# Altium PCB irsensorLED.PcbDoc
Units mil, origin at the board's own origin, x right, y up, seen from the top; angles counter-clockwise.
Board outline 6000 x 4000 mil, 2 copper layers (Top Layer, Bottom Layer); 12 components, 7 nets, 32 pads, 0 vias.
Unrouted connection lines stored in the file: 22.
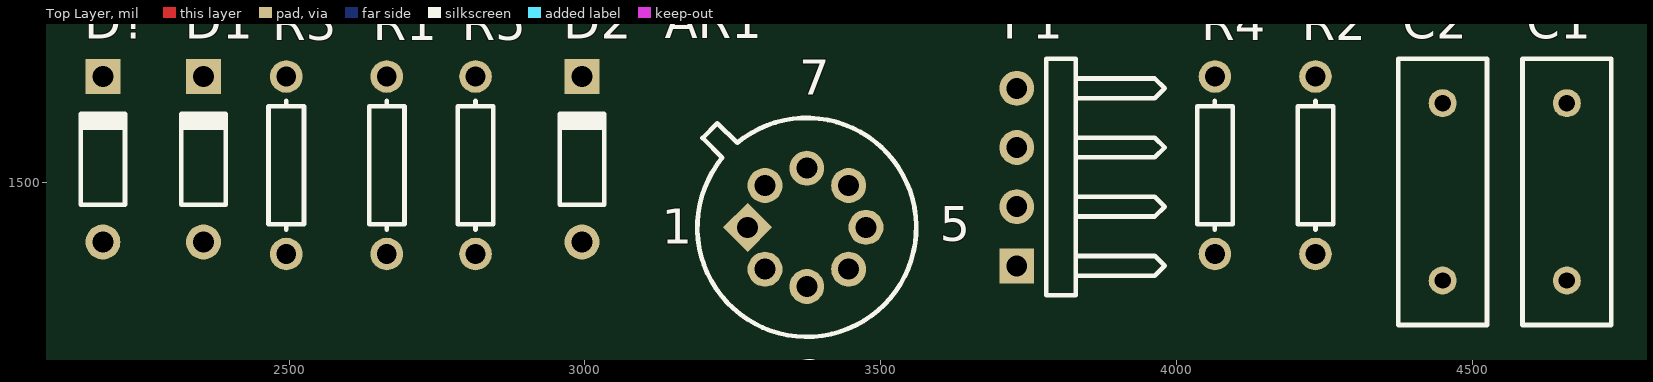
[diagram p0: Top Layer view]
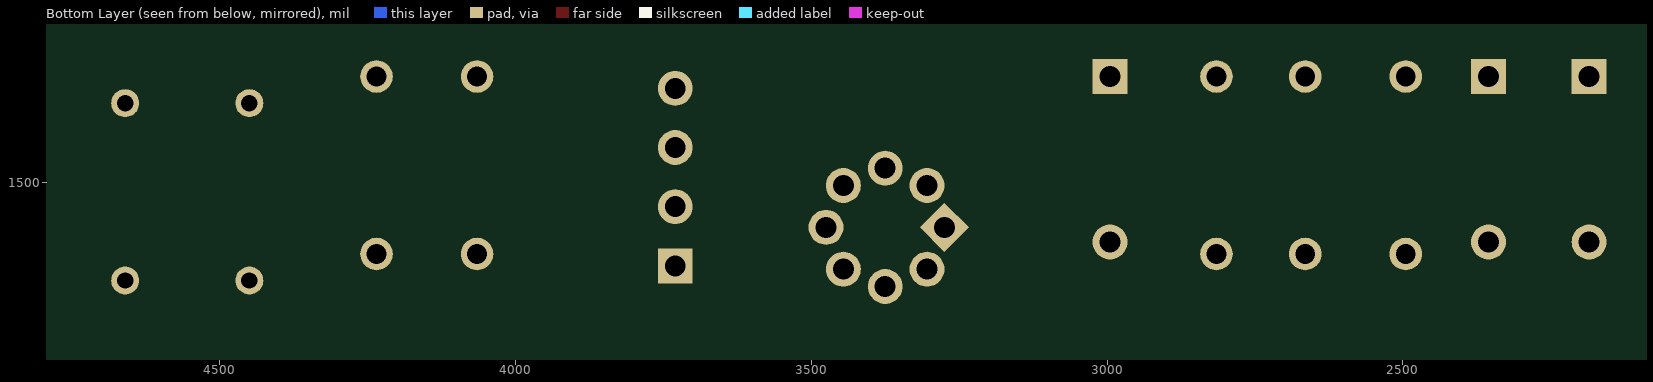
[diagram p1: Bottom Layer view, seen from below]

## Layer stack, top to bottom
Top Solder: solder mask 0.4, Solder Resist, Dk 3.5
Top Layer: signal copper 1.4
Dielectric 1: dielectric 12.6, FR-4, Dk 4.8
Bottom Layer: signal copper 1.4
Bottom Solder: solder mask 0.4, Solder Resist, Dk 3.5

## Board outline
1000,1000 7000,1000 7000,5000 1000,5000

## Design rules (kind name [scope] priority, off if disabled: settings)
Clearance [All] p1: gap=10 ignorepadtopadclearanceinfootprint=FALSE except(0: Arc-Hole Track-Hole SMDPad-Hole THPad-Hole Via-Hole Fill-Hole Poly-Hole Region-Hole Text-Hole)
PolygonConnect [All] p1: connectstyle=Relief reliefconductorwidth=10 reliefentries=4 polygonreliefangle="90 Angle" airgapwidth=10
RoomDefinition irsensorLED [InComponentClass('irsensorLED')] p1: confinementstyle=ConfineIn formatcopy=TRUE lockcomponents=FALSE outline 2135,1125 4745,1125 4745,1820 2135,1820
RoutingVias [All] p1: holewidth=28 width=50 viastyle="Through Hole" minholewidth=28 minwidth=50 maxholewidth=28 maxwidth=50
SolderMaskExpansion [All] p1: expansion=4
Width [All] p1: maxlimit=10 minlimit=10 preferedwidth=10
30 further rules are at their usual default settings.

## Components (designator, comment, footprint, x,y, rotation, side; value= is the part's Value field where it differs from the comment)
AR1 "Op Amp" H-08A 3375,1425 r0 top
C1 "Cap" RAD-0.3 4660,1485 r90 top value=10uf
C2 "Cap" RAD-0.3 4450,1485 r90 top value=100nf
D1 "Photo Diode" DO-35 2355,1540 r90 top
D2 "LED-IR" DO-35 2995,1540 r90 top
D? "Photo Diode" DO-35 2185,1540 r90 top
P1 "Header 4H" HDR1X4H 3730,1360 r90 top
R1 "Res1" AXIAL-0.3 2665,1530 r90 top value=4.7K
R2 "Res1" AXIAL-0.3 4235,1530 r90 top value=22K
R3 "Res1" AXIAL-0.3 2495,1530 r90 top value=1.8K
R4 "Res1" AXIAL-0.3 4065,1530 r90 top value=220
R5 "Res1" AXIAL-0.3 2815,1530 r90 top value=10K

## Footprints (in the part's own frame and the unit in brackets; to place one, negate y for a bottom-side part, rotate by r counter-clockwise, add the part's x,y. Pads: shape width x height; smd on the part's side, far side on the other; paste and mask are expansions set on the pad)
AXIAL-0.3 [mm] "Axial Device, Thru-Hole; 2 Leads; 0.3 in Pin Spacing"
  round 1.4 hole 0.85: 1(-3.81,0) 2(3.81,0)
  silkscreen extent -2.77,-0.76 2.77,0.76
DO-35 [mm] "Diode, Axial; Body 3.8 x 1.9 mm (LxDia. max), Lead Dia. 0.53 mm (max)"
  round 1.5 hole 0.9: 1(-3.55,0)
  rect 1.5x1.5 hole 0.9: 2(3.55,0)
  silkscreen extent -1.95,-0.95 2.05,0.95
H-08A [mm] "Can; 8 Leads; Pin Circle Dia. 5.08 mm; Lead Dia. 0.53 mm (max)"
  rect 1.5x1.5 hole 0.9 rot 45: 1(-2.54,0)
  round 1.5 hole 0.9: 2(-1.796,-1.796) 3(0,-2.54) 4(1.796,-1.796) 5(2.54,0) 6(1.796,1.796) 7(0,2.54) 8(-1.796,1.796)
  silkscreen extent -4.7,-4.7 4.7,4.7
HDR1X4H [mm] "Connector; Header; 4 Position; Right Angle"
  rect 1.5x1.5 hole 0.9: 1(0,0)
  round 1.5 hole 0.9: 2(2.54,0) 3(5.08,0) 4(7.62,0)
  silkscreen extent -1.27,-6.35 8.89,-1.27
RAD-0.3 [mm] "Radial Cap, Thru-Hole; 2 Leads; 0.3 in Pin Spacing"
  round 1.2 hole 0.7: 1(-3.81,0) 2(3.81,0)
  silkscreen extent -5.71,-1.91 5.71,1.91

## Part data
AR1: "FET Operational Amplifier", ComponentLink1Description="Manufacturer Link", ComponentLink1URL=http://www.analog.com/, DatasheetVersion="REV. B", LatestRevisionDate=17-Jul-2002, LatestRevisionNote="Re-released for DXP Platform.", PackageDescription="Can; 8 Leads; Pin Circle Dia. 5.08 mm; Lead Dia. 0.53 mm (max)", PackageReference=H-08A, PackageVersion=1990, Published=8-Jun-2000, Publisher="Altium Limited"
C1 C2: "Capacitor", LatestRevisionDate=17-Jul-2002, LatestRevisionNote="Re-released for DXP Platform.", PackageDescription="Radial Cap, Thru-Hole; 2 Leads; 0.3 in Pin Spacing", PackageReference=RAD-0.3, Published=8-Jun-2000, Publisher="Altium Limited"
D1 D2 D?: library part "Diode 1N914", "High Conductance Fast Diode", Code_JEDEC=DO-204-AH, ComponentLink1Description="Manufacturer Link", ComponentLink1URL=http://www.fairchildsemi.com/, ComponentLink2Description=Datasheet, ComponentLink2URL=http://www.fairchildsemi.com/ds/1N%2F1N4448.pdf, DatasheetVersion=1997, LatestRevisionDate=17-Jul-2002, LatestRevisionNote="Re-released for DXP Platform.", PackageDescription="Diode, Axial; Body 3.8 x 1.9 mm (LxDia. max), Lead Dia. 0.53 mm (max)", PackageReference=DO-35, Published=8-Jun-2000, Publisher="Altium Limited"
P1: "Header, 4-Pin, Right Angle", LatestRevisionDate=17-Jul-2002, LatestRevisionNote="Re-released for DXP Platform.", Publisher="Altium Limited"
R1 R2 R3 R4 R5: "Resistor", LatestRevisionDate=17-Jul-2002, LatestRevisionNote="Re-released for DXP Platform.", PackageDescription="Axial Device, Thru-Hole; 2 Leads; 0.3 in Pin Spacing", PackageReference=AXIAL-0.3, Published=8-Jun-2000, Publisher="Altium Limited"

## Nets (pads, with @x,y where several pads share a name; then routed paths per layer and width w, separated by ;. In a path a pad name is that pad's centre, name@x,y a point inside that pad or via, vN(x,y) a via of type N, cw(c..) or ccw(c..) an arc to the next point about the centre after c; other vN are vias at no path point)
GND: AR1.4 C1.2 C2.1 D1.1 D2.2 D?.2 P1.2 R3.2 R5.1
NetAR1_2: AR1.2 D1.2 R1.2
NetAR1_3: AR1.3 R2.1 R3.1
NetD2_1: D2.1 R4.1
OnLED: D?.1 P1.4
OUT: AR1.1 P1.3 R1.1 R5.2
VCC: AR1.8 C1.1 C2.2 P1.1 R2.2 R4.2
pads on no net: AR1.5 AR1.6 AR1.7

## Text inside footprints (layer, text, board x,y; h text height)
AR1: Top Overlay "1" at 3130.12,1397.6 h59.05; Top Overlay "3" at 3356.53,1140.75 h59.05; Top Overlay "5" at 3599.88,1401.81 h59.05; Top Overlay "7" at 3361.93,1649.41 h59.05